# Altium PCB PT2399.PcbDoc
Units mil, origin at the board's own origin, x right, y up, seen from the top; angles counter-clockwise.
Board outline 6000 x 4000 mil, 2 copper layers (Top Layer, Bottom Layer); 126 components, 30 nets, 318 pads, 0 vias.
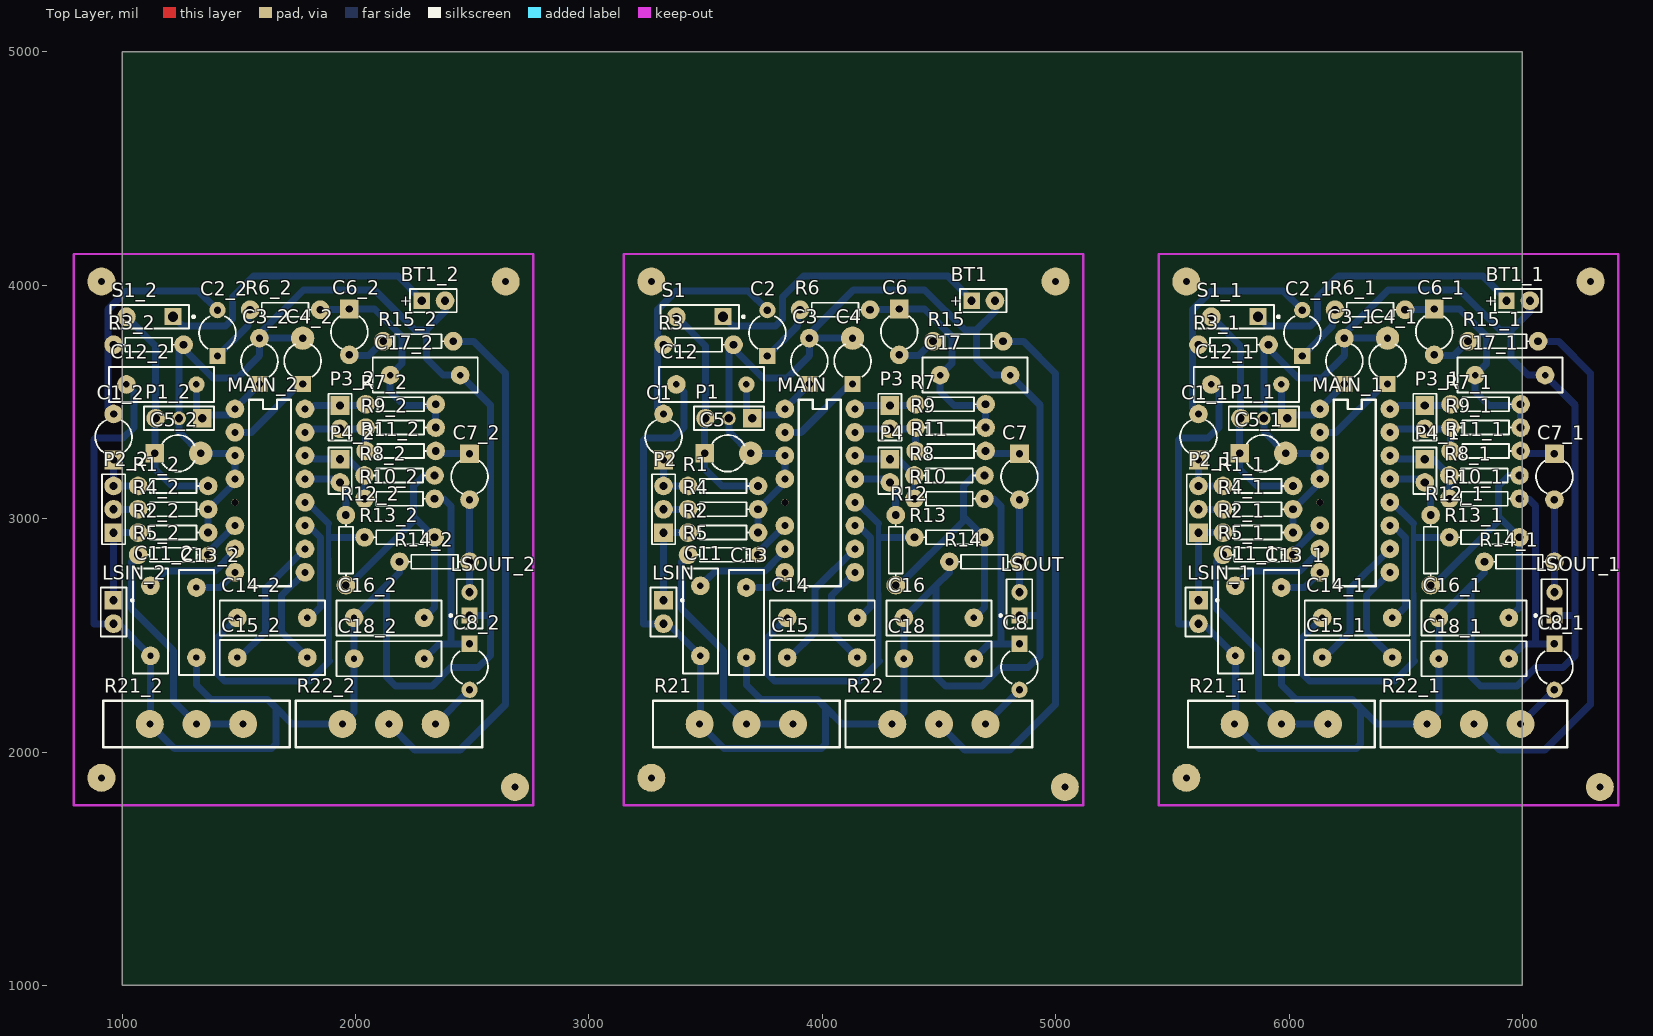
[diagram p0: Top Layer view]
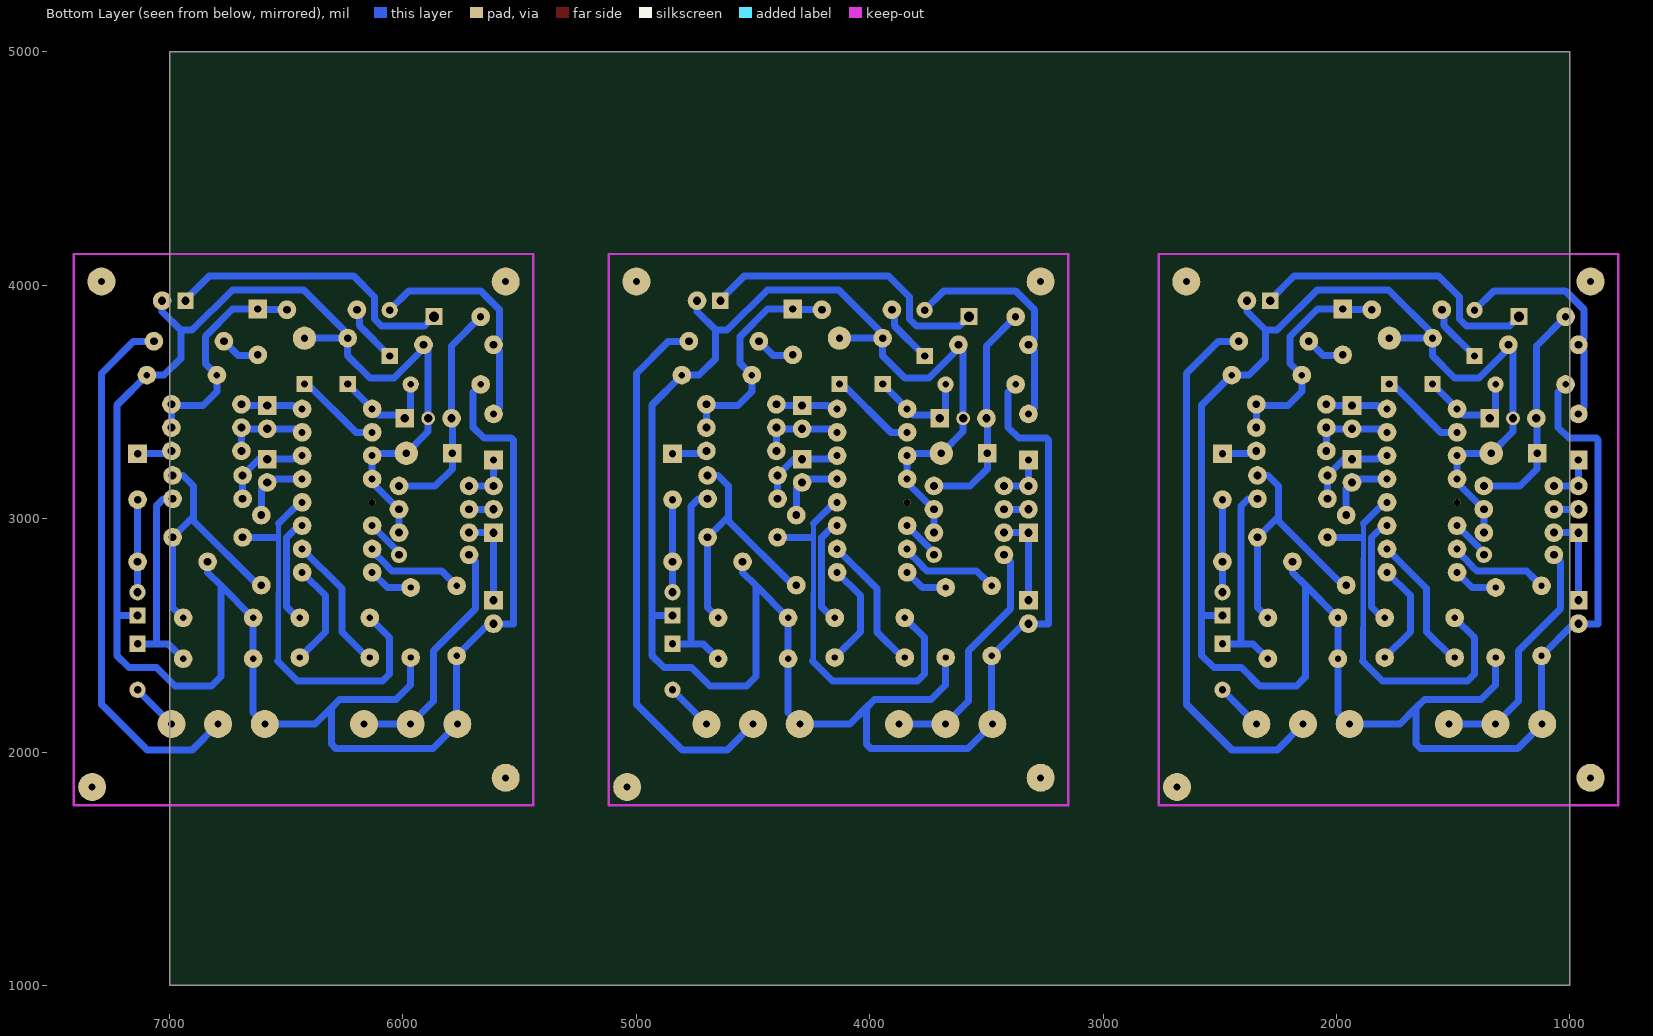
[diagram p1: Bottom Layer view, seen from below]

## Layer stack, top to bottom
Top Solder: solder mask 0.4, Solder Resist, Dk 3.5
Top Layer: signal copper 1.4
Dielectric 1: dielectric 12.6, FR-4, Dk 4.8
Bottom Layer: signal copper 1.4
Bottom Solder: solder mask 0.4, Solder Resist, Dk 3.5

## Board outline
1000,1000 7000,1000 7000,5000 1000,5000

## Design rules (kind name [scope] priority, off if disabled: settings)
Clearance [All] p1: gap=10
PolygonConnect [All] p1: connectstyle=Relief reliefconductorwidth=10 reliefentries=4 polygonreliefangle="90 Angle" airgapwidth=10
RoutingVias [All] p1: holewidth=30 width=50 viastyle="Through Hole" minholewidth=30 minwidth=50 maxholewidth=40 maxwidth=50
SolderMaskExpansion [All] p1: expansion=20
Width [All] p1: maxlimit=60 minlimit=30 preferedwidth=30
30 further rules are at their usual default settings.

## Classes and differential pairs
component class PT2399: BT1 C1 C2 C3 C4 C5 C6 C7 C8 C11 C12 C13 C14 C15 C16 C17 C18 LSIN LSOUT MAIN P1 P2 P3 P4 R1 R2 R3 R4 R5 R6 R7 R8 R9 R10 R11 R12 R13 R14 R15 R21 R22 S1

## Components (designator, comment, footprint, x,y, rotation, side; value= is the part's Value field where it differs from the comment)
BT1 "Battery" BAT-2 4690,3934 r0 top
BT1_1 "Battery" BAT-2 6982,3934 r0 top (schematic designator BT1)
BT1_2 "Battery" BAT-2 2334,3934 r0 top (schematic designator BT1)
C1 "Cap2" CAPR5-4X5#1 3320,3350 r90 top
C1_1 "Cap2" CAPR5-4X5#1 5612,3350 r90 top (schematic designator C1)
C1_2 "Cap2" CAPR5-4X5#1 964,3350 r90 top (schematic designator C1)
C2 "Cap2" CAPR5-4X5#2 3765,3795 r90 top
C2_1 "Cap2" CAPR5-4X5#2 6057,3795 r90 top (schematic designator C2)
C2_2 "Cap2" CAPR5-4X5#2 1409,3795 r90 top (schematic designator C2)
C3 "Cap2" CAPR5-4X5#3 3945,3675 r90 top
C3_1 "Cap2" CAPR5-4X5#3 6237,3675 r90 top (schematic designator C3)
C3_2 "Cap2" CAPR5-4X5#3 1589,3675 r90 top (schematic designator C3)
C4 "Cap2" CAPR5-4X5#4 4130,3675 r90 top
C4_1 "Cap2" CAPR5-4X5#4 6422,3675 r90 top (schematic designator C4)
C4_2 "Cap2" CAPR5-4X5#4 1774,3675 r90 top (schematic designator C4)
C5 "Cap2" CAPR5-4X5#5 3595,3280 r0 top
C5_1 "Cap2" CAPR5-4X5#5 5887,3280 r0 top (schematic designator C5)
C5_2 "Cap2" CAPR5-4X5#5 1239,3280 r0 top (schematic designator C5)
C6 "Cap2" CAPR5-4X5#1 4330,3800 r270 top
C6_1 "Cap2" CAPR5-4X5#1 6622,3800 r270 top (schematic designator C6)
C6_2 "Cap2" CAPR5-4X5#1 1974,3800 r270 top (schematic designator C6)
C7 "Cap2" CAPR5-4X5#1 4845,3180 r270 top
C7_1 "Cap2" CAPR5-4X5#1 7137,3180 r270 top (schematic designator C7)
C7_2 "Cap2" CAPR5-4X5#1 2489,3180 r270 top (schematic designator C7)
C8 "Cap2" CAPR5-4X5#2 4845,2365 r270 top
C8_1 "Cap2" CAPR5-4X5#2 7137,2365 r270 top (schematic designator C8)
C8_2 "Cap2" CAPR5-4X5#2 2489,2365 r270 top (schematic designator C8)
C11 "Cap" RAD-0.3#1 3478,2562 r90 top
C11_1 "Cap" RAD-0.3#1 5770,2562 r90 top (schematic designator C11)
C11_2 "Cap" RAD-0.3#1 1122,2562 r90 top (schematic designator C11)
C12 "Cap" RAD-0.3#2 3525,3575 r0 top
C12_1 "Cap" RAD-0.3#2 5817,3575 r0 top (schematic designator C12)
C12_2 "Cap" RAD-0.3#2 1169,3575 r0 top (schematic designator C12)
C13 "Cap" RAD-0.3#1 3675,2555 r90 top
C13_1 "Cap" RAD-0.3#1 5967,2555 r90 top (schematic designator C13)
C13_2 "Cap" RAD-0.3#1 1319,2555 r90 top (schematic designator C13)
C14 "Cap" RAD-0.3#1 4000,2575 r0 top
C14_1 "Cap" RAD-0.3#1 6292,2575 r0 top (schematic designator C14)
C14_2 "Cap" RAD-0.3#1 1644,2575 r0 top (schematic designator C14)
C15 "Cap" RAD-0.3#1 4000,2405 r180 top
C15_1 "Cap" RAD-0.3#1 6292,2405 r180 top (schematic designator C15)
C15_2 "Cap" RAD-0.3#1 1644,2405 r180 top (schematic designator C15)
C16 "Cap" RAD-0.3#1 4500,2575 r0 top
C16_1 "Cap" RAD-0.3#1 6792,2575 r0 top (schematic designator C16)
C16_2 "Cap" RAD-0.3#1 2144,2575 r0 top (schematic designator C16)
C17 "Cap" RAD-0.3#1 4655,3615 r180 top
C17_1 "Cap" RAD-0.3#1 6947,3615 r180 top (schematic designator C17)
C17_2 "Cap" RAD-0.3#1 2299,3615 r180 top (schematic designator C17)
C18 "Cap" RAD-0.3#1 4500,2400 r180 top
C18_1 "Cap" RAD-0.3#1 6792,2400 r180 top (schematic designator C18)
C18_2 "Cap" RAD-0.3#1 2144,2400 r180 top (schematic designator C18)
LSIN "Speaker" PIN2#1 3320,2650 r270 top
LSIN_1 "Speaker" PIN2#1 5612,2650 r270 top (schematic designator LSIN)
LSIN_2 "Speaker" PIN2#1 964,2650 r270 top (schematic designator LSIN)
LSOUT "Speaker" PIN2#2 4845,2585 r90 top
LSOUT_1 "Speaker" PIN2#2 7137,2585 r90 top (schematic designator LSOUT)
LSOUT_2 "Speaker" PIN2#2 2489,2585 r90 top (schematic designator LSOUT)
MAIN "PT2399" PT2399 3840,3470 r0 top
MAIN_1 "PT2399" PT2399 6132,3470 r0 top (schematic designator MAIN)
MAIN_2 "PT2399" PT2399 1484,3470 r0 top (schematic designator MAIN)
P1 "Header 3" HDR1X3#1 3700,3430 r180 top
P1_1 "Header 3" HDR1X3#1 5992,3430 r180 top (schematic designator P1)
P1_2 "Header 3" HDR1X3#1 1344,3430 r180 top (schematic designator P1)
P2 "Header 3" HDR1X3#2 3320,2940 r90 top
P2_1 "Header 3" HDR1X3#2 5612,2940 r90 top (schematic designator P2)
P2_2 "Header 3" HDR1X3#2 964,2940 r90 top (schematic designator P2)
P3 "Header 2" HDR1X2 4290,3485 r270 top
P3_1 "Header 2" HDR1X2 6582,3485 r270 top (schematic designator P3)
P3_2 "Header 2" HDR1X2 1934,3485 r270 top (schematic designator P3)
P4 "Header 2" HDR1X2 4290,3255 r270 top
P4_1 "Header 2" HDR1X2 6582,3255 r270 top (schematic designator P4)
P4_2 "Header 2" HDR1X2 1934,3255 r270 top (schematic designator P4)
R1 "Res1" AXIAL-0.3#1 3575,3140 r0 top
R1_1 "Res1" AXIAL-0.3#1 5867,3140 r0 top (schematic designator R1)
R1_2 "Res1" AXIAL-0.3#1 1219,3140 r0 top (schematic designator R1)
R2 "Res1" AXIAL-0.3#1 3575,2940 r180 top
R2_1 "Res1" AXIAL-0.3#1 5867,2940 r180 top (schematic designator R2)
R2_2 "Res1" AXIAL-0.3#1 1219,2940 r180 top (schematic designator R2)
R3 "Res1" AXIAL-0.3#1 3470,3745 r180 top
R3_1 "Res1" AXIAL-0.3#1 5762,3745 r180 top (schematic designator R3)
R3_2 "Res1" AXIAL-0.3#1 1114,3745 r180 top (schematic designator R3)
R4 "Res1" AXIAL-0.3#1 3575,3040 r0 top
R4_1 "Res1" AXIAL-0.3#1 5867,3040 r0 top (schematic designator R4)
R4_2 "Res1" AXIAL-0.3#1 1219,3040 r0 top (schematic designator R4)
R5 "Res1" AXIAL-0.3#2 3575,2845 r180 top
R5_1 "Res1" AXIAL-0.3#2 5867,2845 r180 top (schematic designator R5)
R5_2 "Res1" AXIAL-0.3#2 1219,2845 r180 top (schematic designator R5)
R6 "Res1" AXIAL-0.3#1 4055,3895 r0 top
R6_1 "Res1" AXIAL-0.3#1 6347,3895 r0 top (schematic designator R6)
R6_2 "Res1" AXIAL-0.3#1 1699,3895 r0 top (schematic designator R6)
R7 "Res1" AXIAL-0.3#1 4550,3490 r0 top
R7_1 "Res1" AXIAL-0.3#1 6842,3490 r0 top (schematic designator R7)
R7_2 "Res1" AXIAL-0.3#1 2194,3490 r0 top (schematic designator R7)
R8 "Res1" AXIAL-0.3#1 4545,3185 r180 top
R8_1 "Res1" AXIAL-0.3#1 6837,3185 r180 top (schematic designator R8)
R8_2 "Res1" AXIAL-0.3#1 2189,3185 r180 top (schematic designator R8)
R9 "Res1" AXIAL-0.3#1 4550,3390 r0 top
R9_1 "Res1" AXIAL-0.3#1 6842,3390 r0 top (schematic designator R9)
R9_2 "Res1" AXIAL-0.3#1 2194,3390 r0 top (schematic designator R9)
R10 "Res1" AXIAL-0.3#1 4545,3085 r180 top
R10_1 "Res1" AXIAL-0.3#1 6837,3085 r180 top (schematic designator R10)
R10_2 "Res1" AXIAL-0.3#1 2189,3085 r180 top (schematic designator R10)
R11 "Res1" AXIAL-0.3#1 4550,3290 r0 top
R11_1 "Res1" AXIAL-0.3#1 6842,3290 r0 top (schematic designator R11)
R11_2 "Res1" AXIAL-0.3#1 2194,3290 r0 top (schematic designator R11)
R12 "Res1" AXIAL-0.3#1 4315,2865 r270 top
R12_1 "Res1" AXIAL-0.3#1 6607,2865 r270 top (schematic designator R12)
R12_2 "Res1" AXIAL-0.3#1 1959,2865 r270 top (schematic designator R12)
R13 "Res1" AXIAL-0.3#1 4545,2920 r180 top
R13_1 "Res1" AXIAL-0.3#1 6837,2920 r180 top (schematic designator R13)
R13_2 "Res1" AXIAL-0.3#1 2189,2920 r180 top (schematic designator R13)
R14 "Res1" AXIAL-0.3#1 4695,2815 r180 top
R14_1 "Res1" AXIAL-0.3#1 6987,2815 r180 top (schematic designator R14)
R14_2 "Res1" AXIAL-0.3#1 2339,2815 r180 top (schematic designator R14)
R15 "Res1" AXIAL-0.3#1 4625,3760 r0 top
R15_1 "Res1" AXIAL-0.3#1 6917,3760 r0 top (schematic designator R15)
R15_2 "Res1" AXIAL-0.3#1 2269,3760 r0 top (schematic designator R15)
R21 "RPot" 7805 3675,2120 r0 top
R21_1 "RPot" 7805 5967,2120 r0 top (schematic designator R21)
R21_2 "RPot" 7805 1319,2120 r0 top (schematic designator R21)
R22 "RPot" 7805 4500,2120 r0 top
R22_1 "RPot" 7805 6792,2120 r0 top (schematic designator R22)
R22_2 "RPot" 7805 2144,2120 r0 top (schematic designator R22)
S1 "SW-SPST" SPST-2 3475,3865 r180 top
S1_1 "SW-SPST" SPST-2 5767,3865 r180 top (schematic designator S1)
S1_2 "SW-SPST" SPST-2 1119,3865 r180 top (schematic designator S1)

## Footprints (in the part's own frame and the unit in brackets; to place one, negate y for a bottom-side part, rotate by r counter-clockwise, add the part's x,y. Pads: shape width x height; smd on the part's side, far side on the other; paste and mask are expansions set on the pad)
7805 [mil]
  round 120 hole 30: 1(-200,0) 2(0,0) 3(200,0)
  silkscreen extent -400,-100 400,100
AXIAL-0.3#1 [mil] "Axial Device, Thru-Hole; 2 Leads; 0.3 in Pin Spacing"
  round 80 hole 33.46: 1(-150,0) 2(150,0)
  silkscreen extent -109,-30 109,30
AXIAL-0.3#2 [mil] "Axial Device, Thru-Hole; 2 Leads; 0.3 in Pin Spacing"
  round 70 hole 33.46: 1(-150,0)
  round 80 hole 33.46: 2(150,0)
  silkscreen extent -109,-30 109,30
BAT-2 [mil] "Battery; 2 Leads"
  rect 70x70 hole 35.43: 1(-50,0)
  round 80 hole 35.43: 2(50,0)
  silkscreen extent -100,-50 100,50
CAPR5-4X5#1 [mil] "Capacitor; 2 Leads"
  rect 80x80 hole 31.5: 1(-98.43,0)
  round 80 hole 31.5: 2(98.43,0)
  silkscreen extent -66,-79 72,79
CAPR5-4X5#2 [mil] "Capacitor; 2 Leads"
  rect 70x70 hole 31.5: 1(-98.43,0)
  round 70 hole 31.5: 2(98.43,0)
  silkscreen extent -66,-79 72,79
CAPR5-4X5#3 [mil] "Capacitor; 2 Leads"
  rect 70x70 hole 31.5: 1(-98.43,0)
  round 80 hole 31.5: 2(98.43,0)
  silkscreen extent -66,-79 72,79
CAPR5-4X5#4 [mil] "Capacitor; 2 Leads"
  rect 70x70 hole 31.5: 1(-98.43,0)
  round 100 hole 31.5: 2(98.43,0)
  silkscreen extent -66,-79 72,79
CAPR5-4X5#5 [mil] "Capacitor; 2 Leads"
  rect 80x80 hole 31.5: 1(-98.43,0)
  round 100 hole 31.5: 2(98.43,0)
  silkscreen extent -66,-79 72,79
HDR1X2 [mil] "Connector; Header; 2 Position"
  rect 80x80 hole 35.43: 1(0,0)
  round 80 hole 35.43: 2(100,0)
  silkscreen extent -50,-50 150,50
HDR1X3#1 [mm] "Connector; Header; 3 Position"
  rect 2.032x2.032 hole 0.9: 1(0,0)
  round 1.5 hole 0.9: 2(2.54,0)
  round 2.032 hole 0.9: 3(5.08,0)
  silkscreen extent -1.27,-1.27 6.35,1.27
HDR1X3#2 [mm] "Connector; Header; 3 Position"
  rect 2.032x2.032 hole 0.9: 1(0,0)
  round 2.032 hole 0.9: 2(2.54,0) 3(5.08,0)
  silkscreen extent -1.27,-1.27 6.35,1.27
PIN2#1 [mil] "Photosensitive Diode; 2 Leads"
  rect 80x80 hole 35.43: 1(0,0)
  round 80 hole 35.43: 2(100,0)
  silkscreen extent -55,-55 155,86
PIN2#2 [mil] "Photosensitive Diode; 2 Leads"
  rect 70x70 hole 35.43: 1(0,0)
  round 70 hole 35.43: 2(100,0)
  silkscreen extent -55,-55 155,86
PT2399 [mil]
  round 80 hole 30: 1(0,0) 2(0,-100) 3(0,-200) 4(0,-300) 6(0,-500) 7(0,-600) 8(0,-700) 9(300,-700) 10(300,-600) 11(300,-500) 12(300,-400) 13(300,-300) 14(300,-200) 15(300,-100) 16(300,0)
  round 30 hole 30: 5(0,-400)
  silkscreen extent 60,-760 240,40
RAD-0.3#1 [mil] "Radial Cap, Thru-Hole; 2 Leads; 0.3 in Pin Spacing"
  round 80 hole 27.56: 1(-150,0) 2(150,0)
  silkscreen extent -225,-75 225,75
RAD-0.3#2 [mil] "Radial Cap, Thru-Hole; 2 Leads; 0.3 in Pin Spacing"
  round 80 hole 27.56: 1(-150,0)
  round 70 hole 27.56: 2(150,0)
  silkscreen extent -225,-75 225,75
SPST-2 [mil] "Switch; 2 Leads"
  rect 72.83x72.83 hole 43.31: 1(-100,0)
  round 80 hole 30: 2(100,0)
  silkscreen extent -192,-50 169,50

## Part data
BT1 BT1_1 BT1_2: "Multicell Battery"
C1 C1_1 C1_2 C2 C2_1 C2_2 C3 C3_1 C3_2 C4 C4_1 C4_2 C5 C5_1 C5_2 C6 C6_1 C6_2 C7 C7_1 C7_2 C8 C8_1 C8_2 C11 C11_1 C11_2 C12 C12_1 C12_2 C13 C13_1 C13_2 C14 C14_1 C14_2 C15 C15_1 C15_2 C16 C16_1 C16_2 C17 C17_1 C17_2 C18 C18_1 C18_2: "Capacitor"
LSIN LSIN_1 LSIN_2 LSOUT LSOUT_1 LSOUT_2: "Loudspeaker"
P1 P1_1 P1_2 P2 P2_1 P2_2: "Header, 3-Pin"
P3 P3_1 P3_2 P4 P4_1 P4_2: "Header, 2-Pin"
R1 R1_1 R1_2 R2 R2_1 R2_2 R3 R3_1 R3_2 R4 R4_1 R4_2 R5 R5_1 R5_2 R6 R6_1 R6_2 R7 R7_1 R7_2 R8 R8_1 R8_2 R9 R9_1 R9_2 R10 R10_1 R10_2 R11 R11_1 R11_2 R12 R12_1 R12_2 R13 R13_1 R13_2 R14 R14_1 R14_2 R15 R15_1 R15_2: "Resistor"
R21 R21_1 R21_2 R22 R22_1 R22_2: "Potentiometer"
S1 S1_1 S1_2: "Single-Pole, Single-Throw Switch"

## Free pads (board coordinates)
  round 120 hole 30: 0(911.72,1889.76) 0(911.72,4015.75) 0(2644,4015.75) 0(2683.37,1850.39) 0(3267.72,1889.76) 0(3267.72,4015.75) 0(5000,4015.75) 0(5039.37,1850.39) 0(5559.72,1889.76) 0(5559.72,4015.75) 0(7292,4015.75) 0(7331.37,1850.39)

## Nets (pads, with @x,y where several pads share a name; then routed paths per layer and width w, separated by ;. In a path a pad name is that pad's centre, name@x,y a point inside that pad or via, vN(x,y) a via of type N, cw(c..) or ccw(c..) an arc to the next point about the centre after c; other vN are vias at no path point)
GND: BT1.2 C3.2 C4.2 C5.2 C11.1 C12.1 C13.1 C16.1 C17.1 C18.2 LSIN.2 LSOUT.1 MAIN.3 MAIN.4 P1.2 R2.1 R3.1 R4.2 R14.2 R21.1 R22.1 | length 9452
  Bottom Layer w30: C12.1 3407,3543 3407,3391 3361,3345 3243,3345 3235,3337 3235,2548 3318,2548 LSIN.2 3340,2550 C11.1 3478,2123 R21.1 3580,2015 3996,2015 4015,2034 4015,2190 ; C13.1 3675,2287 3737,2225 3980,2225 4015,2190 ; R2.1 R4.2 3840,3155 MAIN.4 MAIN.3 3830,3280 C5.2 3600,3373.43 P1.2 3600,3725 R3.1 3620,3729 3746,3603 3850,3603 3945,3698 C3.2 ; C4.2 C3.2 ; R14.2 4545,2770 4488.19,2713.19 ; BT1.2 4740,3888 4660,3808 ; LSOUT.1 4934.06,2585 ; C3.2 3945,3792 4133,3980 4439,3980 4611,3808 4660,3808 ; 4015,2190 4085,2120 R22.1 4350,2170 C18.2 C16.1 4488.19,2713.19 ; 4488.19,2713.19 4488.19,2322.83 4527.56,2283.46 4685.04,2283.46 4763.78,2362.2 4881.89,2362.2 4934.06,2414.37 4934.06,2585 ; 4660,3808 4660,3686.46 4731.46,3615 C17.1 4934.06,3485.94 4934.06,2585
NetBT1_1: BT1.1 S1.1 | length 1270.2
  Bottom Layer w30: S1.1 3615,3825 3800,3825 3830,3855 3830,3950 3919,4039 4538,4039 BT1.1@4641.5,3935.5
NetC1_1: C1.1 P2.3 R1.1 | length 216.6
  Bottom Layer w30: C1.1 P2.3 R1.1
NetC1_2: C1.2 C2.2 R3.2 | length 1015.7
  Bottom Layer w30: C1.2 3295,3473.43 3295,3720 R3.2 3295,3770 3295,3895 3376.38,3976.38 3682.05,3976.38 C2.2
NetC2_1: C2.1 R6.1 | length 252.3
  Bottom Layer w30: C2.1 3895,3826.57 R6.1@3895,3895
NetC3_1: C3.1 C12.2 MAIN.1 P1.1 | length 462
  Bottom Layer w30: C12.2 3675,3455 P1.1 3715,3445 3815,3445 MAIN.1 3840,3471.57 C3.1
NetC4_1: C4.1 MAIN.2 | length 375.6
  Bottom Layer w30: MAIN.2 3910,3370 4116.57,3576.57 C4.1
NetC5_1: C5.1 P1.3 R1.2 S1.2 | length 963.6
  Bottom Layer w30: S1.2 3500,3740 P1.3 3496.57,3426.57 C5.1 3496.57,3213.43 3570,3140 R1.2
NetC6_1: C6.1 C17.2 R6.2 R7.2 R9.2 | length 986.6
  Bottom Layer w30: R6.2@4195,3895 4321.57,3895 4325,3898.43 4437.57,3898.43 4555,3781 4555,3665 C17.2 4505,3545 4565,3485 4700,3485 R9.2@4700,3385
NetC6_2: C6.2 R15.1 | length 175.5
  Bottom Layer w30: C6.2@4325,3701.57 4326.57,3700 4415,3700 R15.1
NetC7_1: C7.1 R11.2 | length 145.7
  Bottom Layer w30: R11.2@4700,3280 4843.43,3280 C7.1
NetC7_2: C7.2 LSOUT.2 R14.1 | length 396.6
  Bottom Layer w30: LSOUT.2 R14.1 C7.2
NetC8_1: C8.1 C18.1 R10.1 | length 895.3
  Bottom Layer w30: C18.1 4713.43,2463.43 4765,2463.43 ; R10.1 4735,3085 4765,3055 4765,2463.43 ; C8.1 4765,2463.43
NetC8_2: C8.2 R22.3 | length 206.6
  Bottom Layer w30: R22.3 4845,2265 C8.2
NetC11_2: C11.2 MAIN.7 | length 396.7
  Bottom Layer w30: C11.2@3505,2738 3542,2775 3755,2775 3775,2795 3775,2796.92 3813.08,2835 3815,2835 3840,2860 MAIN.7
NetC13_2: C13.2 MAIN.8 | length 191.9
  Bottom Layer w30: C13.2 3775,2705 MAIN.8
NetC14_1: C14.1 MAIN.12 R13.2 | length 2387.1
  Bottom Layer w20: 4241,2386 4241,2979 4245,2390
  Bottom Layer w30: C14.1 3765,2490 3765,2335 3795,2305 4160,2305 ; MAIN.12 4150,3070 4241,2979 ; 4241,2386 4160,2305 ; 4245,2390 4160,2305 ; 4246,2920 R13.2
NetC14_2: C14.2 MAIN.11 | length 460.1
  Bottom Layer w30: MAIN.11 4155,2970 4205.93,2919.07 4205.93,2620.93 4160,2575 C14.2
NetC15_1: C15.1 MAIN.9 | length 452
  Bottom Layer w30: MAIN.9 4040,2670 4040,2515 C15.1
NetC15_2: C15.2 MAIN.10 | length 591
  Bottom Layer w30: C15.2 3860,2405 3970,2515 3970,2700 MAIN.10
NetC16_2: C16.2 R8.1 R12.2 R13.1 | length 1153.5
  Bottom Layer w30: R12.2 4330,2715 4605,2990 4605,3140 4650,3185 R8.1 ; 4605,3010 R13.1 4695,2620 C16.2
NetLSIN_1: LSIN.1 P2.1 R2.2 | length 395
  Bottom Layer w30: LSIN.1 P2.1 R2.2
NetMAIN_6: MAIN.6 R5.1 | length 172.6
  Bottom Layer w30: R5.1 3725,2855 MAIN.6
NetMAIN_13: MAIN.13 P4.2 R12.1 | length 306.6
  Bottom Layer w30: MAIN.13 4275,3170 P4.2 4315,3130 R12.1
NetMAIN_14: MAIN.14 P4.1 R8.2 R10.2 | length 390.2
  Bottom Layer w30: MAIN.14 4165,3270 4180,3255 P4.1 4325,3255 R8.2 R10.2
NetMAIN_15: MAIN.15 P3.2 R9.1 R11.1 | length 371.2
  Bottom Layer w30: MAIN.15 4155,3370 4170,3385 P3.2 4400,3385 R11.1@4400,3280
NetMAIN_16: MAIN.16 P3.1 R7.1 | length 266.2
  Bottom Layer w30: MAIN.16 4165,3470 4180,3485 P3.1 R7.1@4400,3485
NetP2_2: P2.2 R4.1 | length 105
  Bottom Layer w30: P2.2 R4.1
NetR5_2: R5.2 R21.2 R21.3 | length 1058.7
  Bottom Layer w30: R5.2@3425,2838 R5.2 3397,2817 3397,2614 3577,2434 3577,2218 R21.2 R21.3
NetR15_2: R15.2 R22.2 | length 2332.4
  Bottom Layer w30: R22.2@4500,2125 R22.2 4612.13,2007.87 4803.15,2007.87 5000,2204.72 5000,3622.05 4862.05,3760 R15.2
pads on no net: BT1_1.1 BT1_1.2 BT1_2.1 BT1_2.2 C1_1.1 C1_1.2 C1_2.1 C1_2.2 C2_1.1 C2_1.2 C2_2.1 C2_2.2 C3_1.1 C3_1.2 C3_2.1 C3_2.2 C4_1.1 C4_1.2 C4_2.1 C4_2.2 C5_1.1 C5_1.2 C5_2.1 C5_2.2 C6_1.1 C6_1.2 C6_2.1 C6_2.2 C7_1.1 C7_1.2 C7_2.1 C7_2.2 C8_1.1 C8_1.2 C8_2.1 C8_2.2 C11_1.1 C11_1.2 C11_2.1 C11_2.2 C12_1.1 C12_1.2 C12_2.1 C12_2.2 C13_1.1 C13_1.2 C13_2.1 C13_2.2 C14_1.1 C14_1.2 C14_2.1 C14_2.2 C15_1.1 C15_1.2 C15_2.1 C15_2.2 C16_1.1 C16_1.2 C16_2.1 C16_2.2 C17_1.1 C17_1.2 C17_2.1 C17_2.2 C18_1.1 C18_1.2 C18_2.1 C18_2.2 LSIN_1.1 LSIN_1.2 LSIN_2.1 LSIN_2.2 LSOUT_1.1 LSOUT_1.2 LSOUT_2.1 LSOUT_2.2 MAIN.5 MAIN_1.1 MAIN_1.2 MAIN_1.3 MAIN_1.4 MAIN_1.5 MAIN_1.6 MAIN_1.7 MAIN_1.8 MAIN_1.9 MAIN_1.10 MAIN_1.11 MAIN_1.12 MAIN_1.13 MAIN_1.14 MAIN_1.15 MAIN_1.16 MAIN_2.1 MAIN_2.2 MAIN_2.3 MAIN_2.4 MAIN_2.5 MAIN_2.6 MAIN_2.7 MAIN_2.8 MAIN_2.9 MAIN_2.10 MAIN_2.11 MAIN_2.12 MAIN_2.13 MAIN_2.14 MAIN_2.15 MAIN_2.16 P1_1.1 P1_1.2 P1_1.3 P1_2.1 P1_2.2 P1_2.3 P2_1.1 P2_1.2 P2_1.3 P2_2.1 P2_2.2 P2_2.3 P3_1.1 P3_1.2 P3_2.1 P3_2.2 P4_1.1 P4_1.2 P4_2.1 P4_2.2 R1_1.1 R1_1.2 R1_2.1 R1_2.2 R2_1.1 R2_1.2 R2_2.1 R2_2.2 R3_1.1 R3_1.2 R3_2.1 R3_2.2 R4_1.1 R4_1.2 R4_2.1 R4_2.2 R5_1.1 R5_1.2 R5_2.1 R5_2.2 R6_1.1 R6_1.2 R6_2.1 R6_2.2 R7_1.1 R7_1.2 R7_2.1 R7_2.2 R8_1.1 R8_1.2 R8_2.1 R8_2.2 R9_1.1 R9_1.2 R9_2.1 R9_2.2 R10_1.1 R10_1.2 R10_2.1 R10_2.2 R11_1.1 R11_1.2 R11_2.1 R11_2.2 R12_1.1 R12_1.2 R12_2.1 R12_2.2 R13_1.1 R13_1.2 R13_2.1 R13_2.2 R14_1.1 R14_1.2 R14_2.1 R14_2.2 R15_1.1 R15_1.2 R15_2.1 R15_2.2 R21_1.1 R21_1.2 R21_1.3 R21_2.1 R21_2.2 R21_2.3 R22_1.1 R22_1.2 R22_1.3 R22_2.1 R22_2.2 R22_2.3 S1_1.1 S1_1.2 S1_2.1 S1_2.2
copper on no net: | length 55689.1
  Bottom Layer w20: 1885,2386 1885,2979 1889,2390 ; 6533,2386 6533,2979 6537,2390
  Bottom Layer w30: 964,2650 964,2940 1069,2940 ; 964,3040 1069,3040 ; 964,3251.57 964,3140 1069,3140 ; 964,3448.43 939,3473.43 939,3720 964,3745 939,3770 939,3895 1020.38,3976.38 1326.05,3976.38 1409,3893.43 ; 1019,3575 1051,3543 1051,3391 1005,3345 887,3345 879,3337 879,2548 962,2548 964,2550 984,2550 1122,2412 1122,2123 1119,2120 1224,2015 1640,2015 1659,2034 1659,2190 ; 1019,3865 1144,3740 1144,3430 1140.57,3426.57 1140.57,3280 1140.57,3213.43 1214,3140 1369,3140 ; 1069,2838 1069,2845 1041,2817 1041,2614 1221,2434 1221,2218 1319,2120 1519,2120 ; 1149,2738 1186,2775 1399,2775 1419,2795 1419,2796.92 1457.08,2835 1459,2835 1484,2860 1484,2870 ; 1219,3865 1259,3825 1444,3825 1474,3855 1474,3950 1563,4039 2182,4039 2285.5,3935.5 ; 1319,2405 1319,2287 1381,2225 1624,2225 1659,2190 ; 1319,2705 1419,2705 1484,2770 ; 1319,3575 1319,3455 1344,3430 1359,3445 1459,3445 1484,3470 1484,3471.57 1589,3576.57 ; 1369,2845 1369,2855 1484,2970 ; 1369,2940 1369,3040 1484,3155 1484,3170 1484,3270 1474,3280 1337.43,3280 1244,3373.43 1244,3430 1244,3725 1264,3745 1264,3729 1390,3603 1494,3603 1589,3698 1589,3773.43 ; 1409,3696.57 1539,3826.57 1539,3895 ; 1484,3370 1554,3370 1760.57,3576.57 1774,3576.57 ; 1494,2405 1504,2405 1614,2515 1614,2700 1784,2870 ; 1494,2575 1409,2490 1409,2335 1439,2305 1804,2305 ; 1774,3773.43 1589,3773.43 ; 1784,2770 1684,2670 1684,2515 1794,2405 ; 1784,2970 1799,2970 1849.93,2919.07 1849.93,2620.93 1804,2575 1794,2575 ; 1784,3070 1794,3070 1885,2979 ; 1784,3170 1919,3170 1934,3155 1959,3130 1959,3015 ; 1784,3270 1809,3270 1824,3255 1934,3255 1969,3255 2039,3185 2039,3085 ; 1784,3370 1799,3370 1814,3385 1934,3385 2044,3385 2044,3280 ; 1784,3470 1809,3470 1824,3485 1934,3485 2044,3485 ; 1839,3895 1965.58,3895 1969,3898.43 2081.57,3898.43 2199,3781 2199,3665 2149,3615 2149,3545 2209,3485 2344,3485 2344,3385 ; 1885,2386 1804,2305 ; 1889,2390 1804,2305 ; 1890,2920 2039,2920 ; 1959,2715 1974,2715 2249,2990 2249,3140 2294,3185 2339,3185 ; 1969,3701.57 1970.57,3700 2059,3700 2119,3760 ; 2144,2125 2144,2120 2256.13,2007.87 2447.15,2007.87 2644,2204.72 2644,3622.05 2506.05,3760 2419,3760 ; 2189,2815 2189,2770 2132.19,2713.19 ; 2249,3010 2339,2920 2339,2620 2294,2575 ; 2294,2400 2357.43,2463.43 2409,2463.43 ; 2339,3085 2379,3085 2409,3055 2409,2463.43 ; 2344,2120 2489,2265 2489,2266.57 ; 2344,3280 2487.43,3280 2489,3278.43 ; 2384,3934 2384,3888 2304,3808 ; 2489,2463.43 2409,2463.43 ; 2489,2585 2578.06,2585 ; 2489,2685 2489,2815 2489,3081.57 ; 5612,2650 5612,2940 5717,2940 ; 5612,3040 5717,3040 ; 5612,3251.57 5612,3140 5717,3140 ; 5612,3448.43 5587,3473.43 5587,3720 5612,3745 5587,3770 5587,3895 5668.38,3976.38 5974.05,3976.38 6057,3893.43 ; 5667,3575 5699,3543 5699,3391 5653,3345 5535,3345 5527,3337 5527,2548 5610,2548 5612,2550 5632,2550 5770,2412 5770,2123 5767,2120 5872,2015 6288,2015 6307,2034 6307,2190 ; 5667,3865 5792,3740 5792,3430 5788.57,3426.57 5788.57,3280 5788.57,3213.43 5862,3140 6017,3140 ; 5717,2838 5717,2845 5689,2817 5689,2614 5869,2434 5869,2218 5967,2120 6167,2120 ; 5797,2738 5834,2775 6047,2775 6067,2795 6067,2796.92 6105.08,2835 6107,2835 6132,2860 6132,2870 ; 5867,3865 5907,3825 6092,3825 6122,3855 6122,3950 6211,4039 6830,4039 6933.5,3935.5 ; 5967,2405 5967,2287 6029,2225 6272,2225 6307,2190 ; 5967,2705 6067,2705 6132,2770 ; 5967,3575 5967,3455 5992,3430 6007,3445 6107,3445 6132,3470 6132,3471.57 6237,3576.57 ; 6017,2845 6017,2855 6132,2970 ; 6017,2940 6017,3040 6132,3155 6132,3170 6132,3270 6122,3280 5985.43,3280 5892,3373.43 5892,3430 5892,3725 5912,3745 5912,3729 6038,3603 6142,3603 6237,3698 6237,3773.43 ; 6057,3696.57 6187,3826.57 6187,3895 ; 6132,3370 6202,3370 6408.57,3576.57 6422,3576.57 ; 6142,2405 6152,2405 6262,2515 6262,2700 6432,2870 ; 6142,2575 6057,2490 6057,2335 6087,2305 6452,2305 ; 6422,3773.43 6237,3773.43 ; 6432,2770 6332,2670 6332,2515 6442,2405 ; 6432,2970 6447,2970 6497.93,2919.07 6497.93,2620.93 6452,2575 6442,2575 ; 6432,3070 6442,3070 6533,2979 ; 6432,3170 6567,3170 6582,3155 6607,3130 6607,3015 ; 6432,3270 6457,3270 6472,3255 6582,3255 6617,3255 6687,3185 6687,3085 ; 6432,3370 6447,3370 6462,3385 6582,3385 6692,3385 6692,3280 ; 6432,3470 6457,3470 6472,3485 6582,3485 6692,3485 ; 6487,3895 6613.57,3895 6617,3898.43 6729.57,3898.43 6847,3781 6847,3665 6797,3615 6797,3545 6857,3485 6992,3485 6992,3385 ; 6533,2386 6452,2305 ; 6537,2390 6452,2305 ; 6538,2920 6687,2920 ; 6607,2715 6622,2715 6897,2990 6897,3140 6942,3185 6987,3185 ; 6617,3701.57 6618.57,3700 6707,3700 6767,3760 ; 6792,2125 6792,2120 6904.13,2007.87 7095.15,2007.87 7292,2204.72 7292,3622.05 7154.05,3760 7067,3760 ; 6837,2815 6837,2770 6780.19,2713.19 ; 6897,3010 6987,2920 6987,2620 6942,2575 ; 6942,2400 7005.43,2463.43 7057,2463.43 ; 6987,3085 7027,3085 7057,3055 7057,2463.43 ; 6992,2120 7137,2265 7137,2266.57 ; 6992,3280 7135.43,3280 7137,3278.43 ; 7032,3934 7032,3888 6952,3808 ; 7137,2463.43 7057,2463.43 ; 7137,2585 7226.06,2585 ; 7137,2685 7137,2815 7137,3081.57 ; 1589,3773.43 1589,3792 1777,3980 2083,3980 2255,3808 2304,3808 ; 1659,2190 1729,2120 1944,2120 1994,2170 1994,2400 1994,2575 2132.19,2713.19 ; 2132.19,2713.19 2132.19,2322.83 2171.56,2283.46 2329.04,2283.46 2407.78,2362.2 2525.89,2362.2 2578.06,2414.37 2578.06,2585 ; 2304,3808 2304,3686.46 2375.46,3615 2449,3615 2578.06,3485.94 2578.06,2585 ; 6237,3773.43 6237,3792 6425,3980 6731,3980 6903,3808 6952,3808 ; 6307,2190 6377,2120 6592,2120 6642,2170 6642,2400 6642,2575 6780.19,2713.19 ; 6780.19,2713.19 6780.19,2322.83 6819.56,2283.46 6977.04,2283.46 7055.78,2362.2 7173.89,2362.2 7226.06,2414.37 7226.06,2585 ; 6952,3808 6952,3686.46 7023.46,3615 7097,3615 7226.06,3485.94 7226.06,2585

## Polygon pours and split planes (outlines as drawn)
GND on Keep-Out Layer "Keep-Out Layer-No Net" (solid, remove dead copper): 3245,4040 4990,4040 4990,1960 4995,1955 4990,1960 3205,1960

## Keep-outs
Keep-Out Layer:
  lines w10: 793.61,1771.65 793.61,4133.86 2762.11,4133.86 2762.11,1771.65 793.61,1771.65 ; 3149.61,1771.65 5118.11,1771.65 5118.11,4133.86 3149.61,4133.86 3149.61,1771.65 ; 5441.61,1771.65 5441.61,4133.86 7410.11,4133.86 7410.11,1771.65 5441.61,1771.65

## Text inside footprints (layer, text, board x,y; h text height)
BT1: Top Overlay "+" at 4545.51,3911.28 h45.28
BT1_1: Top Overlay "+" at 6837.51,3911.28 h45.28
BT1_2: Top Overlay "+" at 2189.51,3911.28 h45.28